# Altium PCB CO2_Sensor_Unit_board.PcbDoc
Units mm, origin at the board's own origin, x right, y up, seen from the top; angles counter-clockwise.
Board outline 70 x 70 mm, 4 copper layers (Component Side Top, Ground Plane, Power Plane, Component Side Bottom), stack 0.844 mm thick; 81 components, 62 nets, 346 pads, 128 vias.
Unrouted connection lines stored in the file: 6.
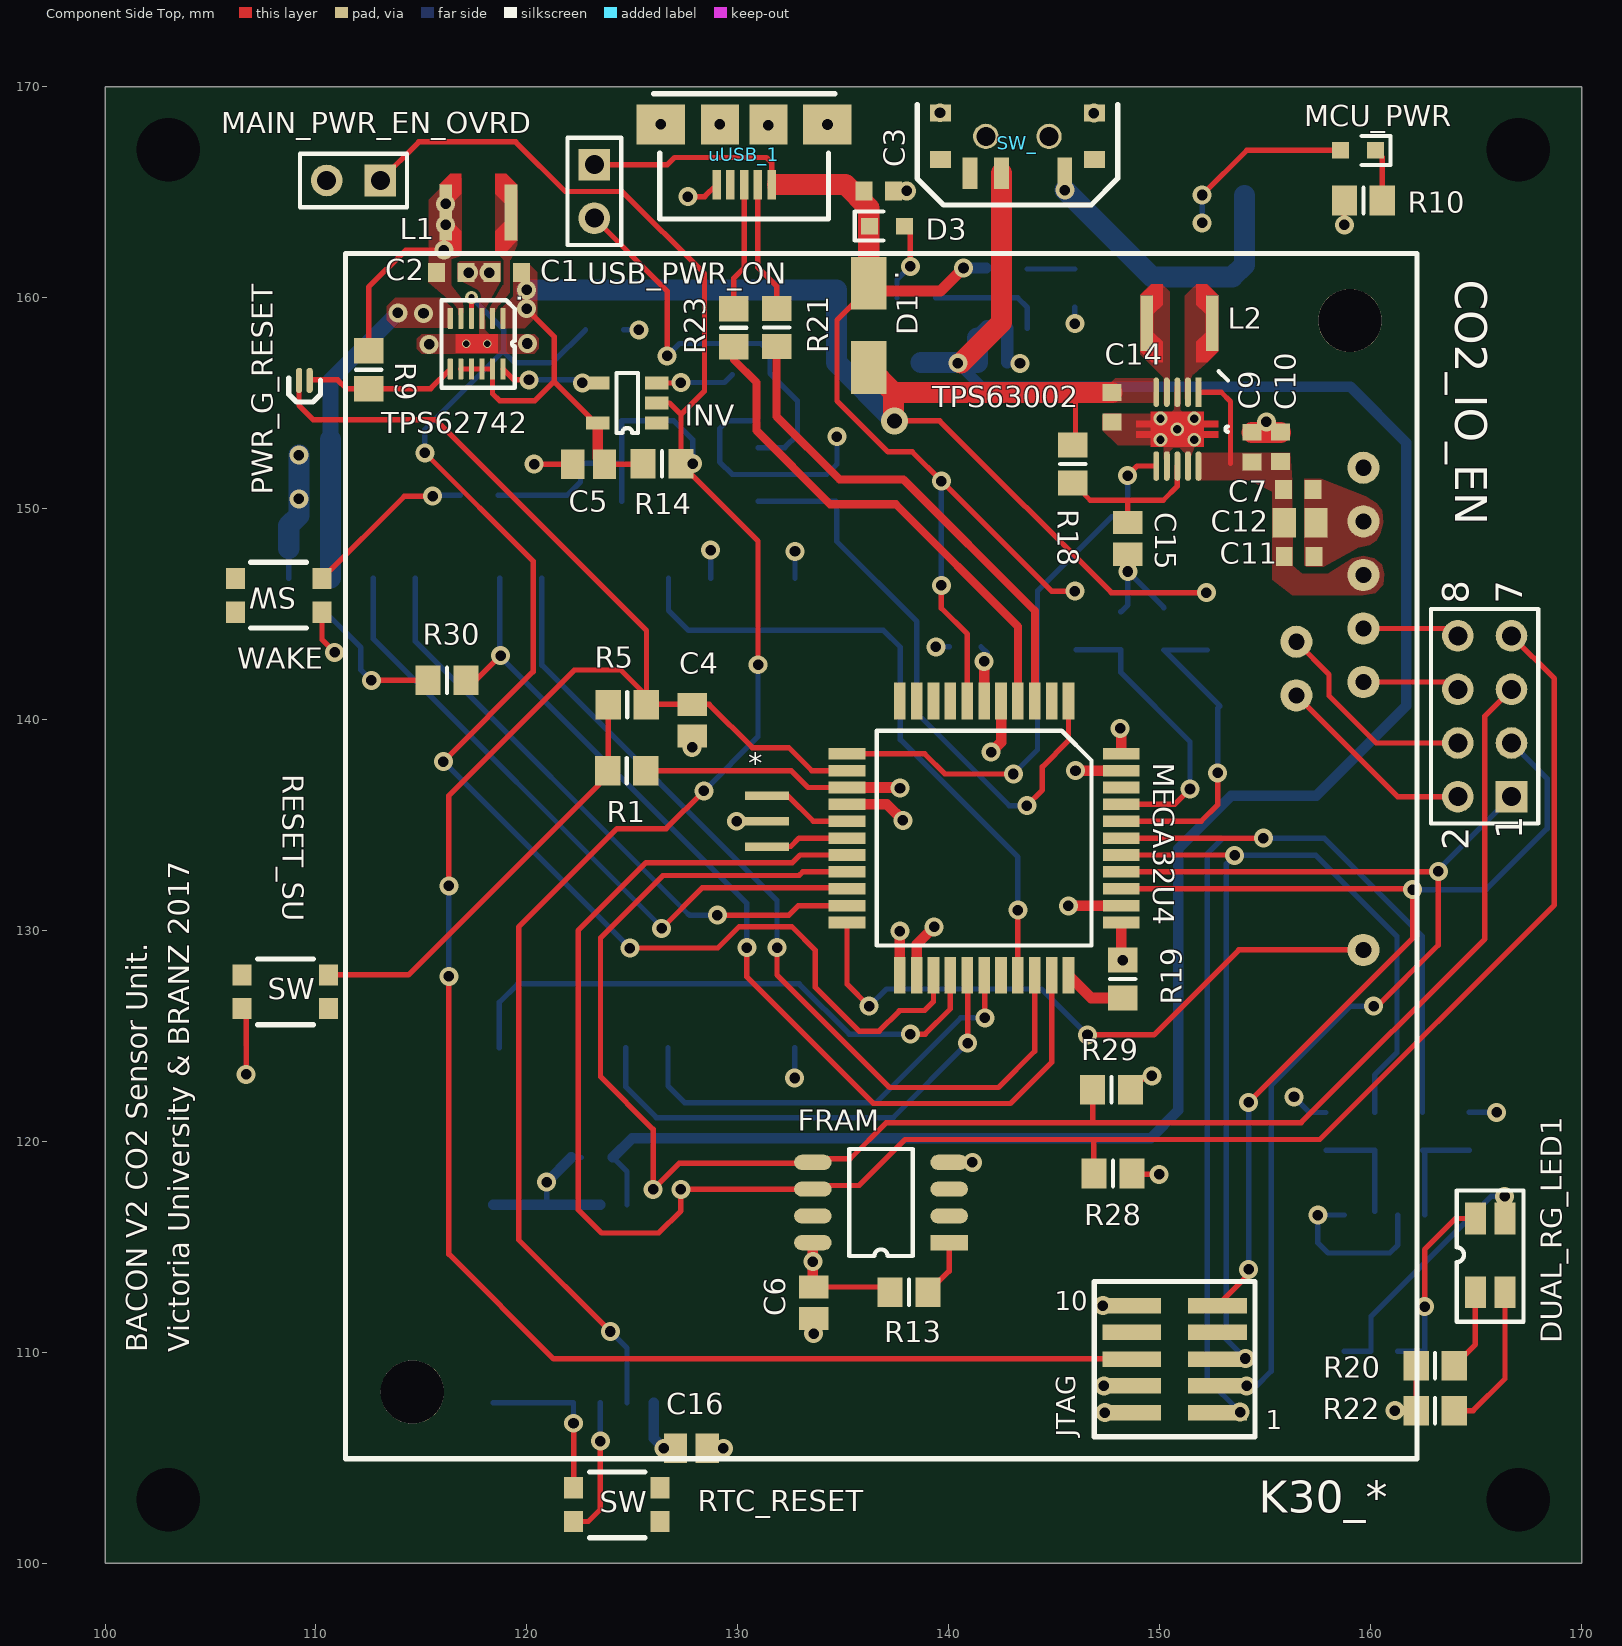
[diagram p0: Component Side Top view]
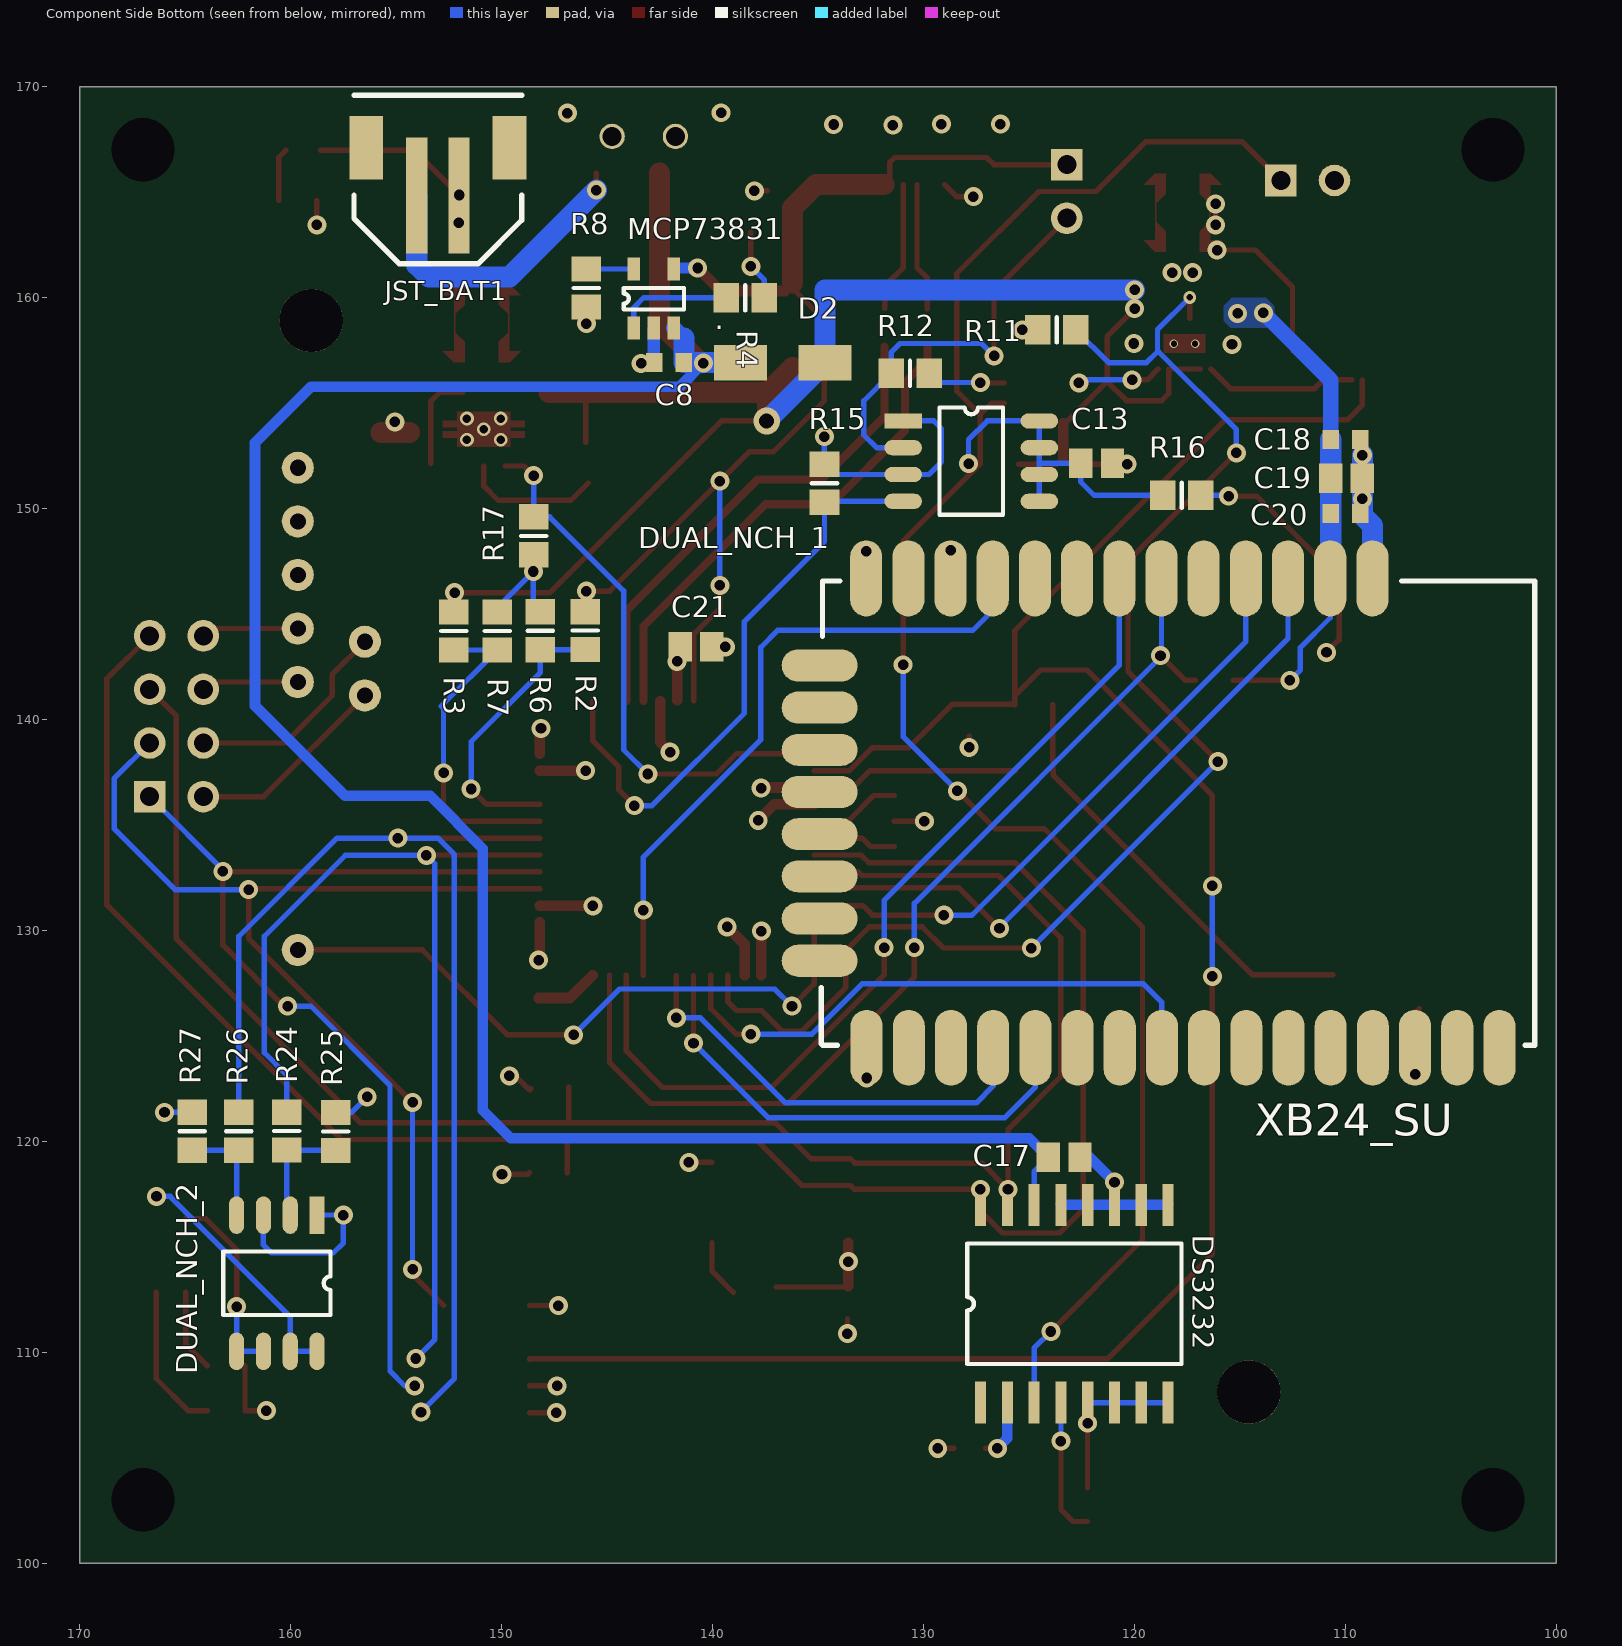
[diagram p1: Component Side Bottom view, seen from below]
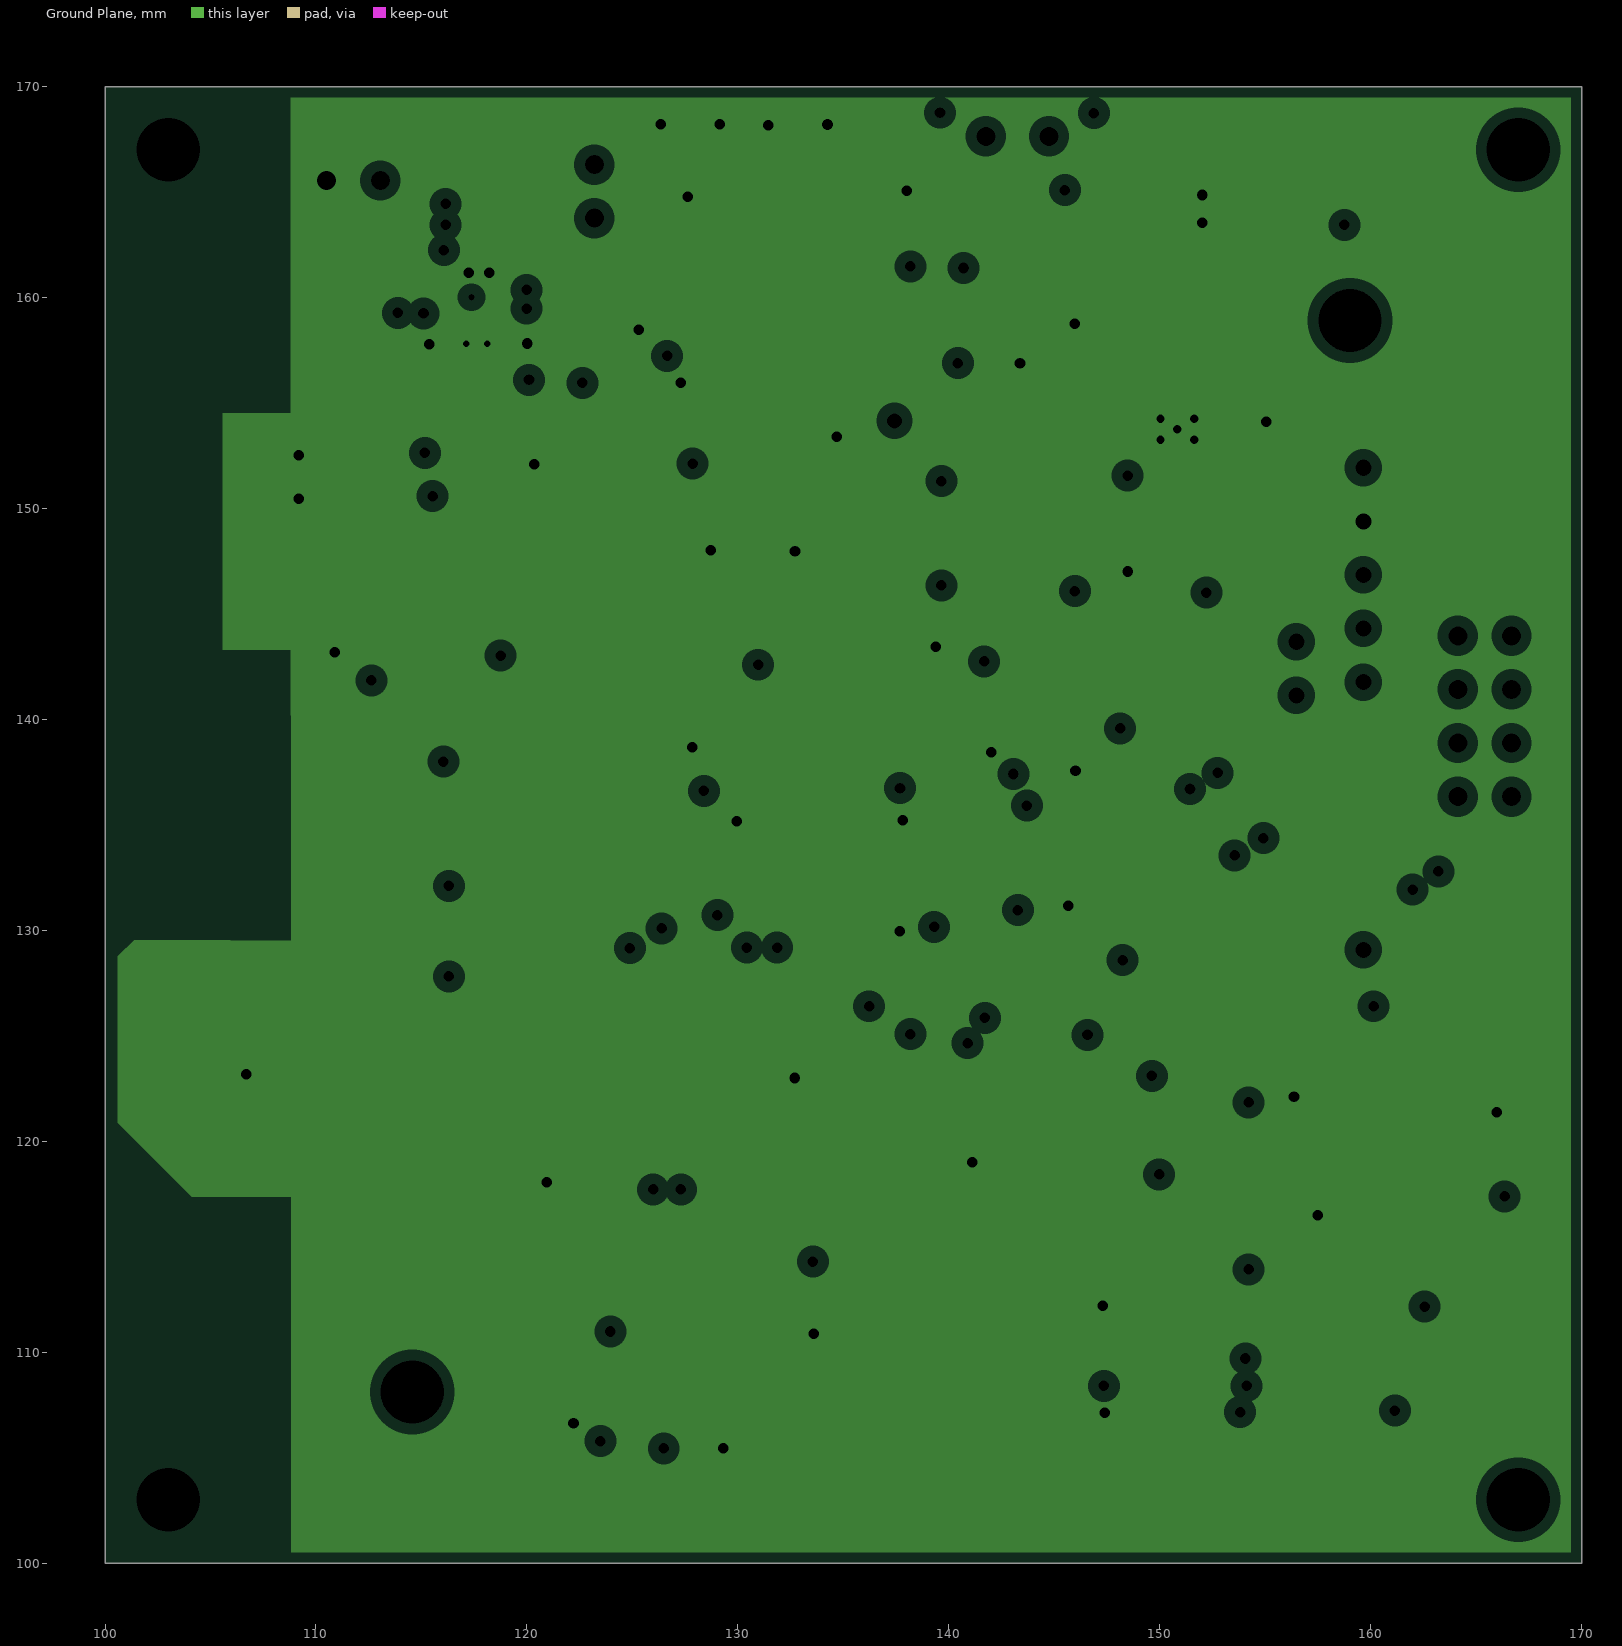
[diagram p2: Ground Plane, clearances drawn from the general rule]
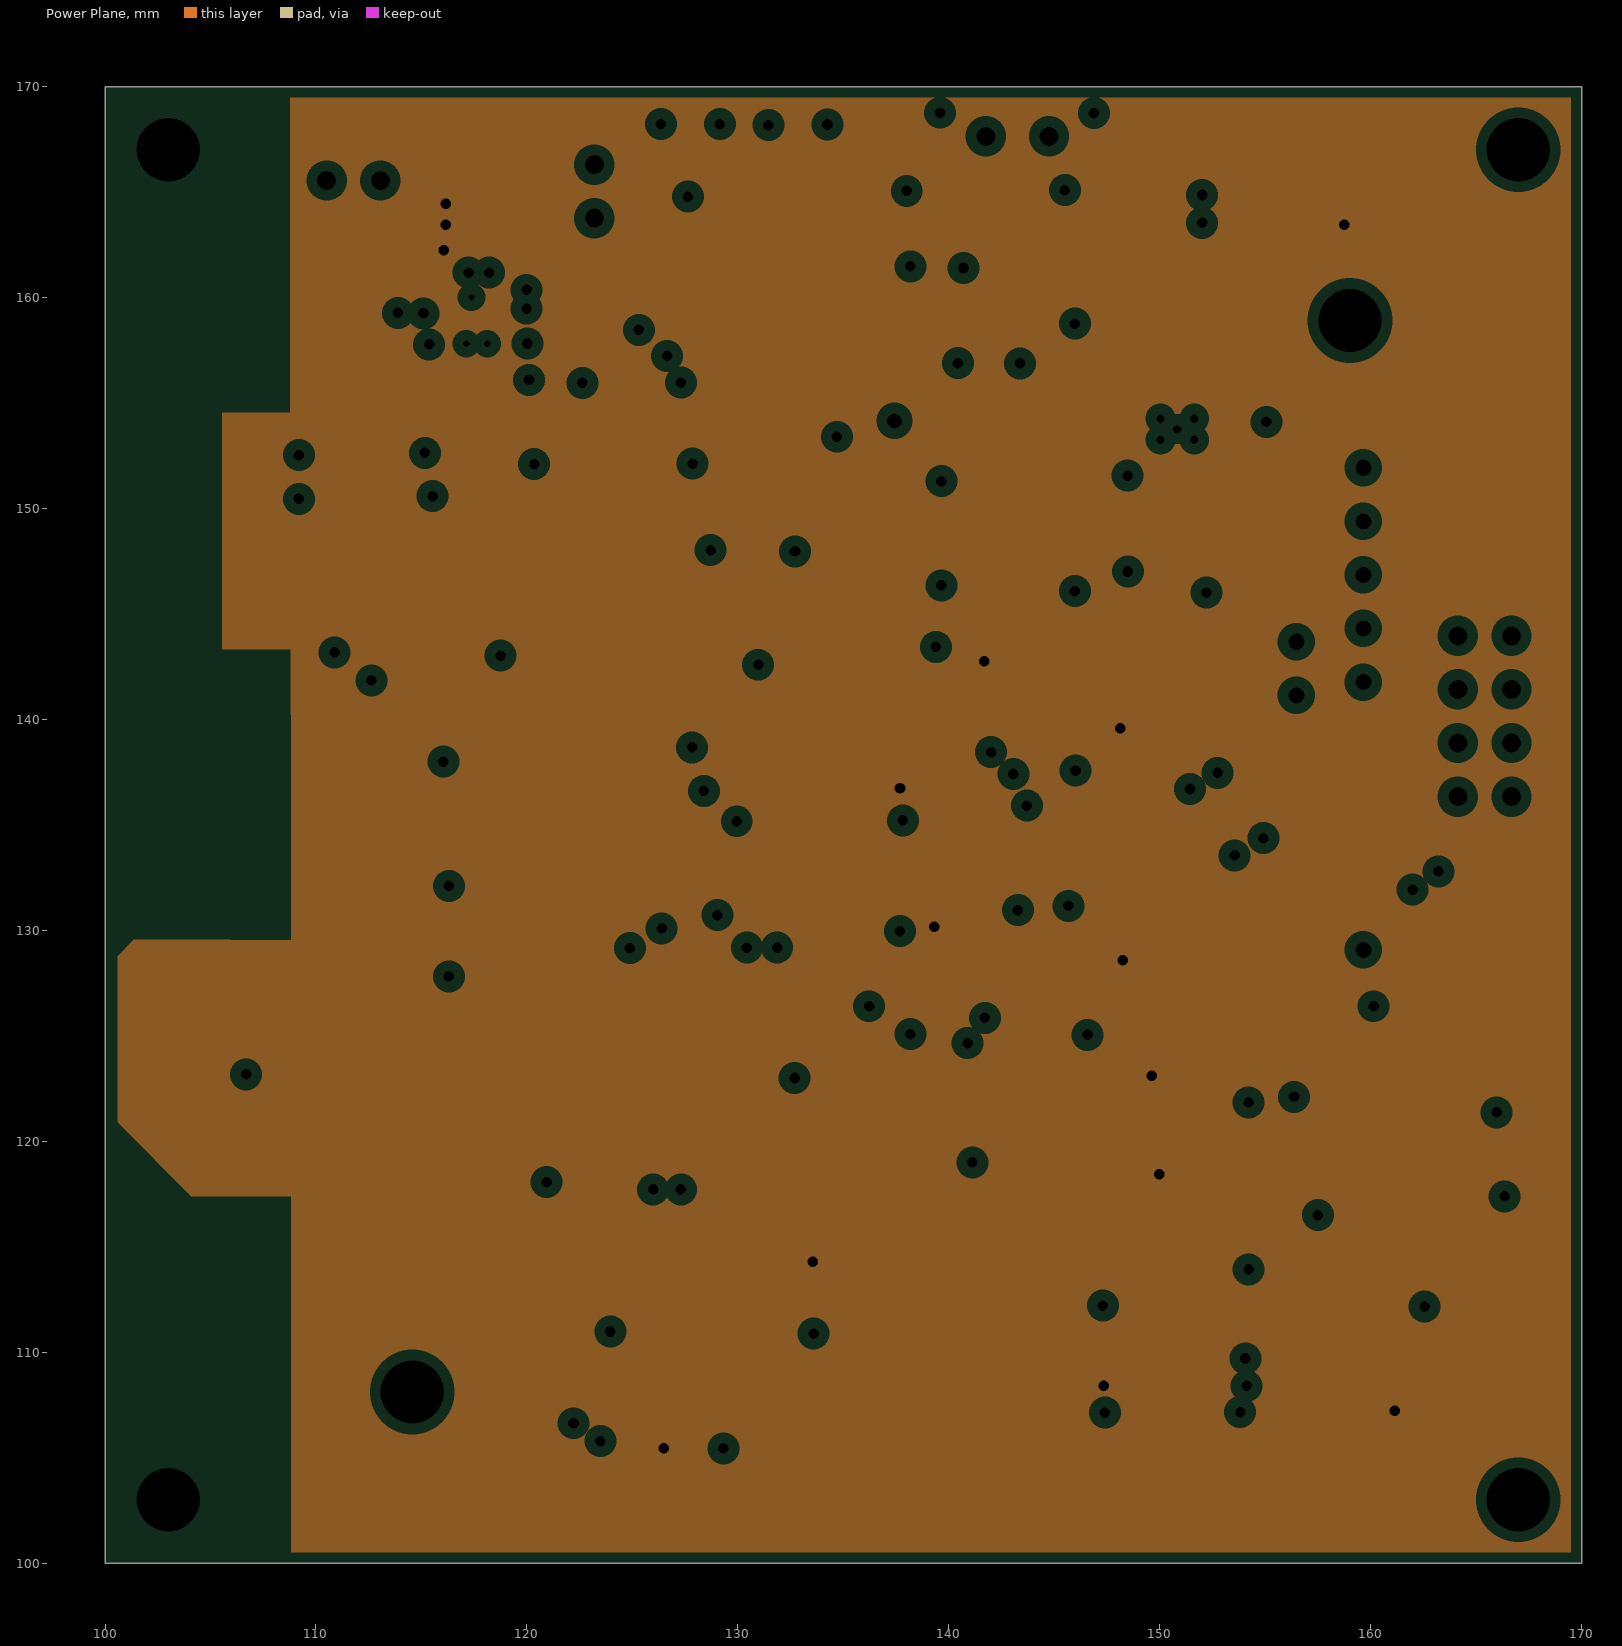
[diagram p3: Power Plane, clearances drawn from the general rule]

## Layer stack, top to bottom
Top Solder: solder mask 0.0102, Solder Resist, Dk 3.5
Component Side Top: signal copper 0.0356
Dielectric 1: core 0.32, FR-4, Dk 4.8
Ground Plane: plane copper 0.036, net GND
Dielectric 3: prepreg 0.127, Dk 4.2
Power Plane: plane copper 0.036, net +3V3
Dielectric 4: core 0.254, Dk 4.2
Component Side Bottom: signal copper 0.0356
Bottom Solder: solder mask 0.0102, Solder Resist, Dk 3.5

## Board outline
100,100 170,100 170,170 100,170

## Design rules (kind name [scope] priority, off if disabled: settings)
Clearance [All] p1: gap=0.152
DiffPairsRouting [All] p1: maxlimit=0.254 minlimit=0.254 mostfreqgap=0.254 toplayer_minwidth=0.381 toplayer_maxwidth=0.381 toplayer_prefwidth=0.381 bottomlayer_minwidth=0.381 bottomlayer_maxwidth=0.381 bottomlayer_prefwidth=0.381 maxuncoupledlength=12.7
HoleSize [All] p1: absolutevalues=TRUE maxlimit=6.3 minlimit=0.3 maxpercent=80.000 minpercent=20.000
MinimumAnnularRing [All] p1: minimumring=0.152
PlaneClearance [All] p1: clearance=0.508
PlaneConnect [All] p1: planeconnectstyle=Direct reliefexpansion=0.508 reliefentries=4 reliefconductorwidth=0.254 reliefairgap=0.254
PolygonConnect [All] p1: connectstyle=Direct reliefconductorwidth=0.254 reliefentries=4 polygonreliefangle="90 Angle" airgapwidth=0.254
RoutingVias [All] p1: holewidth=0.5 width=0.9 viastyle="Through Hole" minholewidth=0.4 minwidth=0.8 maxholewidth=1 maxwidth=1.5
SolderMaskExpansion [All] p1: expansion=0.102
Width [All] p1: maxlimit=10 minlimit=0.152 preferedwidth=0.254
26 further rules are at their usual default settings.

## Classes and differential pairs
differential pair D_SU2: +D_SU2_P -D_SU2_N

## Components (designator, comment, footprint, x,y, rotation, side; value= is the part's Value field where it differs from the comment)
* "Resonator_8MHz" Resonator_8MHz 131.38,133.97 r90 top
C1 "Cap Semi" 1608[0603] 119.04,161.18 r0 top
C2 "Cap Semi" 1608[0603] 116.42,161.18 r180 top
C3 "Cap Semi" 1608[0603] 136.69,165.06 r180 top
C4 "Cap Semi" C0805 127.83,139.96 r90 top
C5 "Cap Semi" C0805 122.93,152.09 r0 top
C6 "Cap Semi" C0805 133.6,112.34 r90 top
C7 "Cap Semi" 1608[0603] 156.57,150.91 r0 top
C8 "Cap Semi" 1608[0603] 142.06,156.92 r180 bottom
C9 "Cap Semi" 1608[0603] 154.37,152.91 r90 top
C10 "Cap Semi" 1608[0603] 155.74,152.93 r90 top
C11 "Cap Semi" 1608[0603] 156.61,147.73 r0 top
C12 "Cap Semi" C0805 156.66,149.33 r0 top
C13 "Cap Semi" C0805 121.79,152.15 r180 bottom
C14 "Cap Semi" 1608[0603] 147.75,154.8 r90 top
C15 "Cap Semi" C0805 148.49,148.58 r270 top
C16 "Cap Semi" C0805 127.8,105.44 r180 top
C17 "Cap Semi" C0805 123.33,119.23 r0 bottom
C18 "Cap Semi" 1608[0603] 109.99,153.27 r180 bottom
C19 "Cap Semi" C0805 109.94,151.43 r180 bottom
C20 "Cap Semi" 1608[0603] 109.99,149.76 r180 bottom
C21 "Cap Semi" C0805 140.78,143.44 r0 bottom
CO2_IO_EN "Header 4X2" HDR2X4 166.68,136.34 r90 top
D1 "Diode" DO-214AC 136.21,160.68 r270 top
D2 "Diode" DO-214AC 138.67,156.91 r180 bottom
D3 "LED2" LED_Single_Orange 136.25,163.38 r0 top
DS3232 "DS3231" "16 SO" 127.29,107.61 r90 bottom
DUAL_NCH_1 "DUAL_MOSFET_IRF8915TRPBF" SOP-8 130.96,154.15 r180 bottom
DUAL_NCH_2 "DUAL_MOSFET_IRF8915TRPBF" SOP-8 158.75,116.5 r270 bottom
DUAL_RG_LED1 "LED_GREEN_RED_HSMF" LED4 164.97,112.84 r90 top
FRAM "FRAM 8-SOP" SOP-8 140.02,115.19 r180 top
INV "Inverter" SOT-23 126.16,154.05 r180 top (schematic designator INV_)
JST_BAT1 "JST_CON" JST_CONN_SMT_Vertical 152.019,164.846 r180 bottom
JTAG "FTSH-105-01-XXX-DV-K" FTSH-105-01-XXX-DV-K 150.71,109.67 r90 top
K30_* "K30_STA" K30_STA 159.66,141.77 r180 top locked
L1 "Inductor" 2.2uH_Inductor 119.25,164.03 r180 top
L2 "Inductor" 2.2uH_Inductor 149.39,158.78 r0 top
MAIN_PWR_EN_OVRD "Header 2" HDR1X2 113.05,165.55 r180 top
MCP73831 "MCP73831" SOT-23 143.73,158.55 r90 bottom
MCU_PWR "LED2" LED_Single_Orange 160.23,166.98 r180 top
MEGA32U4 "ATMEGA32U4-AUR" Quad44 145.68,140.87 r270 top locked (schematic designator MEGA32U4_)
PWR_G_RESET "Header 2" SMD_Jumper 109.7,156.07 r90 top (schematic designator PWR_GOOD_MCU_RESET)
R1 "Res3" 6-0805_N 124.74,137.57 r0 top
R2 "Res3" 6-0805_N 146.04,144.21 r90 bottom
R3 "Res3" 6-0805_N 152.26,144.19 r90 bottom
R4 "Res3" 6-0805_N 138.45,159.98 r0 bottom
R5 "Res3" 6-0805_N 124.76,140.7 r180 top
R6 "Res3" 6-0805_N 148.16,144.2 r270 bottom
R7 "Res3" 6-0805_N 150.2,144.19 r270 bottom
R8 "Res3" 6-0805_N 145.98,160.45 r90 bottom
R9 "Res3" 6-0805_N 112.5,156.58 r90 top
R10 "Res3" 6-0805_N 159.66,164.6 r0 top
R11 "Res3" 6-0805_N 123.68,158.47 r180 bottom
R12 "Res3" 6-0805_N 130.63,156.4 r0 bottom
R13 "Res3" 6-0805_N 138.12,112.84 r180 top
R14 "Res3" 6-0805_N 126.41,152.11 r0 top
R15 "Res3" 6-0805_N 134.69,151.19 r270 bottom
R16 "Res3" 6-0805_N 117.75,150.62 r0 bottom
R17 "Res3" 6-0805_N 148.48,148.7 r270 bottom
R18 "Res3" 6-0805_N 145.89,152.11 r270 top
R19 "Res3" 6-0805_N 148.24,127.69 r270 top
R20 "Res3" 6-0805_N 163.06,109.36 r180 top
R21 "Res3" 6-0805_N 131.84,158.58 r270 top
R22 "Res3" 6-0805_N 163.06,107.23 r180 top
R23 "Res3" 6-0805_N 129.81,158.57 r270 top
R24 "Res3" 6-0805_N 160.19,120.48 r90 bottom
R25 "Res3" 6-0805_N 157.87,120.46 r270 bottom
R26 "Res3" 6-0805_N 162.46,120.47 r90 bottom
R27 "Res3" 6-0805_N 164.67,120.47 r270 bottom
R28 "Res3" 6-0805_N 147.79,118.47 r180 top
R29 "Res3" 6-0805_N 147.72,122.45 r180 top
R30 "Res3" 6-0805_N 116.21,141.85 r0 top
RESET_SU "SW-PB" SW_TACTILE 106.49,127.89 r0 top
RTC_RESET "SW-PB" SW_TACTILE 122.22,103.57 r0 top (schematic designator RTC_RESET_1)
SW_ "Slide_switch" Slide_SW 143.256,167.64 r180 top
TPS62742 "TPS62742" "WSON12 - small" 118.872,159.512 r270 top
TPS63002 "TPS63002DRCT" "SON10 - small" 151.84,155.56 r270 top (schematic designator TPS63002_)
USB_PWR_ON "Header 2" HDR1X2 123.2,166.3 r270 top
uUSB_1 "micro_USB" MicroUSB_CONN 130.302,165.354 r180 top
WAKE "SW-PB" SW_TACTILE 110.29,145.08 r180 top
XB24_SU "XB24CDMUIS-001" XB24_RADIO 108.712,146.558 r270 bottom locked

## Footprints (in the part's own frame and the unit in brackets; to place one, negate y for a bottom-side part, rotate by r counter-clockwise, add the part's x,y. Pads: shape width x height; smd on the part's side, far side on the other; paste and mask are expansions set on the pad)
2.2uH_Inductor [mm] "LPS3314-222MRB"
  rect 0.6x2.65 smd: 1(0,0) 2(3.1,0)
  Component Side Top region: -0.3,1.325 0.225,1.85 0.75,1.85 0.75,0.882 0.3,0.44 0.3,-0.44 0.75,-0.882 0.75,-1.85 0.225,-1.85 -0.3,-1.325 0.25,-1.325 0.25,1.325
  Component Side Top region: 3.4,-1.325 2.875,-1.85 2.35,-1.85 2.35,-0.882 2.8,-0.44 2.8,0.44 2.35,0.882 2.35,1.85 2.875,1.85 3.4,1.325 2.85,1.325 2.85,-1.325
  body extent -0.3,-1.85 3.4,1.85, height 1.4
6-0805_N [mm] "Chip Resistor, Body 2.0x1.2mm, IPC Medium Density"
  rect 1.2x1.4 smd: 1(-0.9,0) 2(0.9,0)
  silkscreen extent 0,-0.6 0,0.6, body extent -1.07,-0.7 1.07,0.7, height 0.7
"16 SO" [mm]
  rect 1.98x0.53 smd: 1(0,0) 2(0,-1.27) 3(0,-2.54) 4(0,-3.81) 5(0,-5.08) 6(0,-6.35) 7(0,-7.62) 8(0,-8.89) 9(9.37,-8.89) 10(9.37,-7.62) 11(9.37,-6.35) 12(9.37,-5.08) 13(9.37,-3.81) 14(9.37,-2.54) 15(9.37,-1.27) 16(9.37,0)
  silkscreen extent 1.83,-9.53 7.54,0.63, body extent 1.83,-9.53 7.54,0.63, height 3
1608[0603] [mm] "Chip Capacitor, Body 1.6x0.8mm, IPC High Density"
  rect 0.8x0.9 smd: 1(-0.7,0) 2(0.7,0)
  body extent -0.87,-0.48 0.87,0.48, height 1.3
C0805 [mm] "Chip Capacitor, Body 2.0x1.3mm, IPC High Density"
  rect 1.1x1.4 smd: 1(-0.75,0) 2(0.75,0)
  body extent -1.1,-0.72 1.1,0.72, height 1.4
DO-214AC [mm] "DIODE B340A-13-F"
  rect 2.5x1.7 smd: 1(0,0) 2(4,0)
  body extent -0.68,-1.4 4.68,1.4, height 2.3
FTSH-105-01-XXX-DV-K [mil]
  rect 29x110 smd mask+2: 1(-100,-80) 2(-100,80) 3(-50,-80) 4(-50,80) 5(0,-80) 6(0,80) 7(50,-80) 8(50,80) 9(100,-80) 10(100,80)
  silkscreen extent -145,-150 145,150
HDR1X2 [mm] "Connector; Header; 2 Position"
  rect 1.5x1.5 hole 0.9: 1(0,0)
  round 1.5 hole 0.9: 2(2.54,0)
  silkscreen extent -1.27,-1.27 3.81,1.27
HDR2X4 [mm] "Connector; Header; 4x2 Position"
  rect 1.5x1.5 hole 0.9: 1(0,0)
  round 1.5 hole 0.9: 2(0,2.54) 3(2.54,0) 4(2.54,2.54) 5(5.08,0) 6(5.08,2.54) 7(7.62,0) 8(7.62,2.54)
  silkscreen extent -1.27,-1.27 8.89,3.81
JST_CONN_SMT_Vertical [mm] "B2B-PH-SM4-TB(LF)(SN) 2 Contacts Surface mount JST connector"
  rect 1x5.5 smd: 1(0,0) 2(-2,0)
  rect 1.6x3 smd: 3(-4.4,2.25) 3(2.4,2.25)
  silkscreen extent -4.97,-3.25 2.98,4.75, body extent -4.97,-0.25 2.98,4.75, height 6.6
K30_STA [mil]
  round 60 hole 30: 1(0,500) 2(0,0) 3(0,-100) 4(125.2,24.8) 5(125.2,-75.2) 6(0,-200) 7(0,-300) 8(0,-400)
  round 118.11 hole 118.11 unplated: 9(25.2,-674.8) 9(1775.2,1325.2)
  silkscreen extent -100,-800 1900,1450, body extent -100,-800 1900,1450, height 807
LED4 [mm]
  rect 1.5x1 smd: 1(0,0) 2(3.5,0) 3(0,-1.4) 4(3.5,-1.4)
  silkscreen extent -1.4,-2.29 4.83,0.89, body extent -0.03,-1.88 3.62,0.5, height 2
LED_Single_Orange [mm] "KP-1608SECK"
  rect 0.8x0.8 smd: 1(0,0) 2(1.65,0)
  silkscreen extent -0.71,-0.67 0.65,0.7, body extent -0.07,-0.5 1.77,0.46, height 2
MicroUSB_CONN [mm]
  rect 0.4x1.4 smd: 1(-1.3,0) 2(-0.65,0) 3(0,0) 4(0.65,0) 5(1.3,0)
  rect 2.3x1.9 smd: 5(-3.95,-2.85) 5(3.95,-2.85)
  rect 1.8x1.9 smd: 5(-1.15,-2.85) 5(1.15,-2.85)
  silkscreen extent -4.3,-4.3 4.3,1.63
Quad44 [mm]
  rect 1.75x0.55 smd: 1(0,0) 2(0,-0.8) 3(0,-1.6) 4(0,-2.4) 5(0,-3.2) 6(0,-4) 7(0,-4.8) 8(0,-5.6) 9(0,-6.4) 10(0,-7.2) 11(0,-8) 23(13,-8) 24(13,-7.2) 25(13,-6.4) 26(13,-5.6) 27(13,-4.8) 28(13,-4) 29(13,-3.2) 30(13,-2.4) 31(13,-1.6) 32(13,-0.8) 33(13,0)
  rect 0.55x1.75 smd: 12(2.5,-10.5) 13(3.3,-10.5) 14(4.1,-10.5) 15(4.9,-10.5) 16(5.7,-10.5) 17(6.5,-10.5) 18(7.3,-10.5) 19(8.1,-10.5) 20(8.9,-10.5) 21(9.7,-10.5) 22(10.5,-10.5) 34(10.5,2.5) 35(9.7,2.5) 36(8.9,2.5) 37(8.1,2.5) 38(7.3,2.5) 39(6.5,2.5) 40(5.7,2.5) 41(4.9,2.5) 42(4.1,2.5) 43(3.3,2.5) 44(2.5,2.5)
  silkscreen extent 1.41,-9.09 11.59,1.09, body extent 1.27,-9.27 11.68,1.27, height 1.2
Resonator_8MHz [mm] "CSTCE8M00G55Z-R0"
  rect 0.4x2.1 smd: 1(0,0) 2(1.2,0) 3(2.4,0)
  body extent -0.33,-0.95 2.84,0.94, height 1.2
Slide_SW [mm] "PCM12SMTR"
  rect 0.7x1.5 smd: 1(-2.25,1.75) 2(0.75,1.75) 3(2.25,1.75)
  rect 1x0.8 smd: 4(-3.65,-1.1) 4(-3.65,1.1) 4(3.65,-1.1) 4(3.65,1.1)
  round 1.2 hole 0.9: 5(-1.5,0) 5(1.5,0)
  silkscreen extent -4.75,-1.5 4.75,3.25, body extent -3.14,-1.65 3.11,1.58, height 3
SMD_Jumper [mm] "Connector; Header; 2 Position"
  oval 1.2x0.3 smd: 1(0,0) 2(0,0.5)
  silkscreen extent -1.02,-0.52 0.1,0.99
"SON10 - small" [mm]
  rect 1.4x0.28 smd: 1(0.05,0)
  oval 1.4x0.28 smd: 2(0.05,-0.5) 3(0.05,-1) 4(0.05,-1.5) 5(0.05,-2) 6(3.55,-2) 7(3.55,-1.5) 8(3.55,-1) 9(3.55,-0.5) 10(3.55,0)
  Component Side Top region: 1.4,0.25 1.4,0.95 1.7,0.95 1.7,0.25 1.9,0.25 1.9,0.95 2.2,0.95 2.2,0.25 2.625,0.25 2.625,-2.25 2.2,-2.25 2.2,-2.95 1.9,-2.95 1.9,-2.25 1.7,-2.25 1.7,-2.95 1.4,-2.95 1.4,-2.25 0.975,-2.25 0.975,0.25
  silkscreen extent -0.94,0.96 1.92,1.4, body extent 0.01,-2.95 3.65,0.96, height 2
SOP-8 [mm]
  rect 1.78x0.72 smd: 1(0,0)
  oval 1.78x0.72 smd: 2(0,-1.27) 3(0,-2.54) 4(0,-3.81) 5(6.46,-3.81) 6(6.46,-2.54) 7(6.46,-1.27) 8(6.46,0)
  silkscreen extent 1.72,-4.45 4.74,0.63, body extent 1.72,-4.45 4.74,0.63, height 2
SOT-23 [mm]
  rect 1.1x0.6 smd: 1(0,0) 2(0,-0.95) 3(0,-1.9) 4(2.8,-1.9) 5(2.8,0)
  silkscreen extent 0.89,-2.38 1.91,0.48, body extent 0.72,-2.19 2.08,0.24, height 2
SW_TACTILE [mm] "KMR231G LFS"
  rect 0.9x1 smd: 1(0,0) 1(4.1,0) 2(0,-1.6) 2(4.1,-1.6)
  silkscreen extent 0.75,-2.37 3.37,0.75, body extent 0.27,-2.13 3.77,0.55, height 2
"WSON12 - small" [mm]
  rrect40% 1x0.25 smd mask+0.07: 1(0.5,0) 2(0.5,-0.5) 3(0.5,-1) 4(0.5,-1.5) 5(0.5,-2) 6(0.5,-2.5) 7(2.9,-2.5) 8(2.9,-2) 9(2.9,-1.5) 10(2.9,-1) 11(2.9,-0.5) 12(2.9,0)
  Component Side Top region: 1.25,-2.25 2.15,-2.25 2.15,-0.25 1.25,-0.25
  silkscreen extent -0.36,-2.93 3.79,0.55, body extent 0.47,-2.74 3.02,0.24, height 2
XB24_RADIO [mm] "XB24CDMUIS-001"
  oval 3.6x1.52 smd: 1(-0.125,0) 2(-0.125,-2) 3(-0.125,-4) 4(-0.125,-6) 5(-0.125,-8) 6(-0.125,-10) 7(-0.125,-12) 8(-0.125,-14) 9(-0.125,-16) 10(-0.125,-18) 11(-0.125,-20) 12(-0.125,-22) 13(-0.125,-24) 22(22.125,-23.98) 23(22.125,-21.98) 24(22.125,-19.98) 25(22.125,-17.98) 26(22.125,-15.98) 27(22.125,-13.98) 28(22.125,-11.98) 29(22.125,-9.98) 30(22.125,-7.98) 31(22.125,-5.98) 32(22.125,-3.98) 33(22.125,-1.98) 34(22.125,0.02) 35(22.125,2.02) 36(22.125,4.02) 37(22.125,6.02)
  oval 1.52x3.6 smd: 14(4,-26.21) 15(6,-26.21) 16(8,-26.21) 17(10,-26.21) 18(12,-26.21) 19(14,-26.21) 20(16,-26.21) 21(18,-26.21)
  silkscreen extent 0,-26.12 22,7.7, body extent 0,-26.07 22,7.7, height 4

## Part data
C1 C2 C3 C4 C5 C6 C7 C8 C9 C10 C11 C12 C13 C14 C15 C16 C17 C18 C19 C20 C21: "Capacitor (Semiconductor SIM Model)"
CO2_IO_EN: "Header, 4-Pin, Dual row"
D1 D2: "Default Diode"
D3 MCU_PWR: "Typical RED, GREEN, YELLOW, AMBER GaAs LED"
INV: library part SN74LVC1GU04
JTAG: "TERMINAL STRIP, .050\"(1.27mm) PITCH, 10 PINS, KEYED"
MAIN_PWR_EN_OVRD PWR_G_RESET USB_PWR_ON: "Header, 2-Pin"
R1 R2 R3 R4 R5 R6 R7 R8 R9 R10 R11 R12 R13 R14 R15 R16 R17 R18 R19 R20 R21 R22 R23 R24 R25 R26 R27 R28 R29 R30: "Resistor"
RESET_SU RTC_RESET WAKE: "Switch"
TPS63002: library part TPS63001DRCT

## Free pads (board coordinates)
  round 0 hole 3: 0(103,103) 0(103,167) 0(167,103) 0(167,167)

## Via types
v1: diameter 0.9, hole 0.5, Component Side Top to Component Side Bottom, 103 vias
v2: diameter 0.9, hole 0.5, Component Side Top to Component Side Bottom, tented both sides, 8 vias
v3: diameter 0.9, hole 0.5, Component Side Top to Component Side Bottom, tented bottom, 6 vias
v4: diameter 0.65, hole 0.4, Component Side Top to Component Side Bottom, tented top, 5 vias
v5: diameter 0.4, hole 0.3, Component Side Top to Component Side Bottom, tented both sides, 2 vias
v6: diameter 0.9, hole 0.5, Component Side Top to Component Side Bottom, tented top, 2 vias
v7: diameter 1.27, hole 0.711, Component Side Top to Component Side Bottom, 1 vias
v8: diameter 0.61, hole 0.3, Component Side Top to Component Side Bottom, 1 vias

## Nets (pads, with @x,y where several pads share a name; then routed paths per layer and width w, separated by ;. In a path a pad name is that pad's centre, name@x,y a point inside that pad or via, vN(x,y) a via of type N, cw(c..) or ccw(c..) an arc to the next point about the centre after c; other vN are vias at no path point)
+3V3: C2.2 C6.2 C16.2 C21.2 DS3232.2 FRAM.8 JTAG.4 L1.2 MEGA32U4.6 MEGA32U4.14 MEGA32U4.24 MEGA32U4.34 MEGA32U4.44 R1.2 R9.2 R10.1 R13.2 R19.1 R20.2 R22.2 R28.1 R29.1 TPS62742.5 | length 45.8
  Component Side Top w0.254: R9.2 112.5,160.49 114.26,162.25 v1(116.07,162.25) v1@116.14,162.18 ; v1(116.15,163.44) L1.2 v1(116.15,164.44) ; R1.2 132.53,137.57 133.33,136.77 MEGA32U4.14 ; v1(126.49,105.44) C16.2 ; C6.2 R13.2@136.97,113.09 ; v2@137.66,136.77 v2(137.69,136.74) ; v1(147.36,108.4) JTAG.4 ; R29.1@148.62,122.48 148.67,122.43 149.34,123.1 v1(149.63,123.1) ; R28.1@148.69,118.5 148.76,118.43 v1(149.98,118.43) ; v1(158.76,163.44) R10.1 ; v1(161.15,107.23) R22.2 R20.2
  Component Side Top w0.5: C6.2@133.56,113.13 v1(133.56,114.29) FRAM.8 ; MEGA32U4.14 v2@137.66,136.77 ; MEGA32U4.24 138.48,129.33 v2(139.31,130.16) ; MEGA32U4.6@141.68,140.9 v1(141.68,142.75) ; v1(148.13,139.57) 148.18,139.52 MEGA32U4.44 ; MEGA32U4.34 148.18,128.65 v1(148.24,128.59)
  Component Side Bottom w0.254: C21.2 141.83,143.14 141.83,142.87 v1(141.68,142.75)
  Component Side Bottom w0.5: DS3232.2 126.02,105.91 v1(126.49,105.44)
+3V3_RADIO_SU: C18.1 C19.1 C20.1 R30.1 TPS62742.6 XB24_SU.2 | length 20.5
  Component Side Top w0.254: v3(112.63,141.85) R30.1 ; v1@114.88,159.25 v1(115.1,159.25)
  Component Side Bottom w0.254: 110.712,144.818 112.13,143.4 112.13,142.35 v3(112.63,141.85)
  Component Side Bottom w0.75: C18.1 110.69,156.08 v1(113.88,159.27)
  Component Side Bottom w1: XB24_SU.2@110.69,146.705 C20.1 C19.1 C18.1
CO2_EN: MEGA32U4.12 R17.1 TPS63002.6 | length 26.7
  Component Side Top w0.254: MEGA32U4.12 138.86,138.37 139.82,137.41 v6(143.06,137.41) ; v1(148.48,151.56) 148.93,152.01 TPS63002.6
  Component Side Bottom w0.254: v6(143.06,137.41) 144.21,138.56 144.21,146.09 147.72,149.6 R17.1 v1(148.48,151.56)
CO2_PWR: C7.1 C9.1 C10.1 C11.1 C12.1 K30_*.6 TPS63002.1 TPS63002.10 | length 4.6
  Component Side Top w0.254: TPS63002.1 152.92,155.51 153.36,155.07 153.36,152.13
CO2_STAT: K30_*.1 MEGA32U4.22 | length 30.7
  Component Side Top w0.254: MEGA32U4.22 135.18,127.45 v1(136.23,126.4) ; v1(146.58,125.04) 149.728,125.04 153.758,129.07 K30_*.1
  Component Side Bottom w0.254: v1(136.23,126.4) 137.05,127.22 144.4,127.22 v1(146.58,125.04)
CTS_SU: MEGA32U4.28 XB24_SU.25 | length 20.8
  Component Side Top w0.254: v1(141.71,125.85) MEGA32U4.28@141.71,127.84
  Component Side Bottom w0.254: XB24_SU.25 126.692,122.618 127.49,121.82 136.54,121.82 140.57,125.85 v1(141.71,125.85)
D_SU2_N: MEGA32U4.3 R21.2 | length 23.7
  Component Side Top w0.381: R21.2 131.84,154.36 134.83,151.37 137.86,151.37 144.08,145.15 MEGA32U4.3
D_SU2_P: MEGA32U4.4 R23.2 | length 24.2
  Component Side Top w0.381: R23.2 129.81,157.05 130.88,155.98 130.88,153.69 134.37,150.2 137.49,150.2 143.28,144.41 MEGA32U4.4
D_SU_N: R21.1 uUSB_1.2 | length 6.2
  Component Side Top w0.254: uUSB_1.2 130.952,161.428 131.84,160.54 R21.1
D_SU_P: R23.1 uUSB_1.3 | length 6.1
  Component Side Top w0.254: R23.1 129.81,160.92 130.302,161.412 uUSB_1.3
DTR_SU: MEGA32U4.30 XB24_SU.10 | length 31.1
  Component Side Top w0.254: MEGA32U4.30 v2(143.28,130.96)
  Component Side Bottom w0.254: XB24_SU.10 126.712,145.168 127.66,144.22 136.91,144.22 137.71,143.42 137.71,139.04 143.28,133.47 v2(143.28,130.96)
GLED_EN_SU: JTAG.1 MEGA32U4.39 R26.2 | length 54.6
  Component Side Top w0.254: MEGA32U4.39 v1(154.92,134.37)
  Component Side Bottom w0.254: v1(153.82,107.16) 152.25,108.73 152.25,133.61 153.01,134.37 v1(154.92,134.37) 157.8,134.37 162.46,129.71 R26.2
GND: *.2 C1.1 C2.1 C3.1 C4.1 C5.1 C6.1 C7.2 C8.1 C9.2 C10.2 C11.2 C12.2 C13.2 C14.1 C15.2 C16.1 C17.1 C18.2 C19.2 C20.2 C21.1 DS3232.5 DS3232.6 DS3232.7 DS3232.8 DS3232.9 DS3232.10 DS3232.11 DS3232.12 DS3232.13 DUAL_NCH_1.1 DUAL_NCH_1.3 DUAL_NCH_2.1 DUAL_NCH_2.3 FRAM.4 INV.3 JST_BAT1.1 JTAG.2 JTAG.10 K30_*.7 MAIN_PWR_EN_OVRD.2 MCP73831.2 MCU_PWR.2 MEGA32U4.5 MEGA32U4.15 MEGA32U4.23 MEGA32U4.35 MEGA32U4.43 R6.1 R7.1 R8.1 R11.1 R12.1 R15.1 R17.2 R25.1 R27.1 RESET_SU.2 RTC_RESET.1 TPS62742.3 TPS63002.3 TPS63002.7 TPS63002.9 uUSB_1.5 WAKE.1 XB24_SU.1 XB24_SU.11 XB24_SU.13 XB24_SU.22 XB24_SU.35 | length 102.9
  Component Side Top w0.254: RESET_SU.2@106.49,126.29 106.692,126.088 v1(106.692,123.172) ; WAKE.1@110.29,145.08 110.29,143.78 v1(110.89,143.18) ; C2.1 v1(117.24,161.18) ; v1(118.21,161.18) C1.1 ; v1(120.34,152.1) 120.35,152.09 C5.1 ; RTC_RESET.1@122.22,103.57 v1@122.22,106.62 ; INV.3 127.28,155.95 v1(127.3,155.97) ; uUSB_1.5@126.352,168.204 v1(126.352,168.222) ; v1(127.63,164.78) 128.428,164.78 uUSB_1.5@129.002,165.354 ; v3(127.83,138.67) C4.1 ; C16.1 v1(129.32,105.44) ; uUSB_1.5@129.152,168.204 v1(129.152,168.222) ; v3(129.95,135.17) *.2 ; v1(131.452,168.178) uUSB_1.5@131.452,168.204 ; v1(133.6,110.88) C6.1 ; C3.1 v1(138.01,165.06) ; FRAM.4 v1(141.12,119) ; v1(147.31,112.21) JTAG.10 ; v1(147.4,107.13) JTAG.2 ; v1(152.01,164.86) 154.13,166.98 MCU_PWR.2 ; 155.06,153.61 v1(155.06,154.1)
  Component Side Top w0.5: MEGA32U4.15 137.07,135.97 v2(137.83,135.21) ; MEGA32U4.23 v2(137.68,129.96) ; v2(142.01,138.45) 142.48,138.92 MEGA32U4.5 ; v2(145.67,131.16) 145.68,131.17 MEGA32U4.35 ; v2(146.01,137.57) MEGA32U4.43
  Component Side Top w1: C9.2 155.06,153.61 C10.2@155.72,153.61
  Component Side Bottom w0.254: v1(106.692,123.172) XB24_SU.35 ; XB24_SU.1 XB24_SU.1@108.712,148.092 ; DS3232.8 DS3232.7 DS3232.6 DS3232.5 v1(122.21,106.63) ; v1(120.34,152.1) v1@120.39,152.15 ; DS3232.11 v1(120.94,118.06) ; C17.1@122.11,119.23 C17.1 ; R11.1 v1(125.31,158.47) ; v1(127.3,155.97) 129.36,155.97 R12.1@129.74,156.35 ; XB24_SU.11 v1(128.712,148.022) ; DUAL_NCH_1.1 129.51,154.15 129.14,153.78 129.14,152.21 129.74,151.61 DUAL_NCH_1.3 134.21,151.61 R15.1 134.7,152.1 v1(134.7,153.4) ; v1(132.692,122.998) XB24_SU.22 ; XB24_SU.13 v1(132.712,147.962) ; v1(139.39,143.44) C21.1 ; C8.1 142.8,156.88 v1(143.38,156.88) ; v1(145.98,158.76) R8.1 ; R6.1 148.49,145.43 v1(148.49,147.01) R7.1@150.2,145.3 ; v1@148.48,147.02 R17.2 ; v1(152.019,163.539) JST_BAT1.1 ; v1(156.37,122.1) 157.11,121.36 R25.1 ; DUAL_NCH_2.1 v1(157.5,116.5) 157.5,115.18 157.98,114.7 160.91,114.7 161.29,115.08 DUAL_NCH_2.3 ; R27.1 v1(165.98,121.37)
  Component Side Bottom w0.5: DS3232.9 DS3232.10 DS3232.11 DS3232.12 DS3232.13 ; v1(120.94,118.06) C17.1@122.11,119.23
  Component Side Bottom w0.6: C8.1@142.78,156.94 MCP73831.2
  Component Side Bottom w1: XB24_SU.1@108.712,148.092 108.712,149.182 109.19,149.66 v1(109.19,150.45) C19.2 v1(109.19,152.53)
  other v1: 115.37,157.78 120.02,157.82 134.252,168.204
  other v4: 150.04,153.26 151.64,153.26 150.84,153.76 150.04,154.26 151.64,154.26
  other v5: 117.122,157.812 118.122,157.812
MAIN_PWR_EN: INV.4 TPS62742.12 | length 4.3
  Component Side Top w0.254: TPS62742.12 119.384,156.1 v1(120.1,156.1)
  Component Side Bottom w0.254: v1(120.1,156.1) 122.74,156.1 122.63,155.99 v1(122.63,155.95)
MCU_PWR_EN: DUAL_NCH_1.4 MEGA32U4.1 R15.2 | length 28.1
  Component Side Top w0.254: v6(143.7,135.91) 144.44,136.65 144.44,137.75 145.68,138.99 MEGA32U4.1
  Component Side Bottom w0.254: DUAL_NCH_1.4 134.64,150.34 R15.2 134.69,148.44 138.49,144.64 138.49,140.29 142.87,135.91 v6(143.7,135.91)
Net*_1: *.1 MEGA32U4.17 | length 4
  Component Side Top w0.254: *.1 132.51,133.97 132.91,134.37 MEGA32U4.17
Net*_3: *.3 MEGA32U4.16 | length 4.3
  Component Side Top w0.254: *.3@131.38,136.39 132.36,136.39 133.58,135.17 MEGA32U4.16
NetC15_1: C15.1 R18.2 TPS63002.8 | length 7.6
  Component Side Top w0.254: R18.2 146.71,150.39 150.17,150.39 150.84,151.06 TPS63002.8 ; C15.1 148.49,150.37
NetCO2_IO_EN_2: CO2_IO_EN.2 K30_*.4 | length 9.6
  Component Side Top w0.254: K30_*.4 161.28,136.34 CO2_IO_EN.2
NetCO2_IO_EN_4: CO2_IO_EN.4 K30_*.5 | length 10.2
  Component Side Top w0.254: K30_*.5 158.03,142.13 158.03,141.12 160.27,138.88 CO2_IO_EN.4
NetCO2_IO_EN_6: CO2_IO_EN.6 K30_*.2 | length 4.6
  Component Side Top w0.254: K30_*.2 163.79,141.77 CO2_IO_EN.6
NetCO2_IO_EN_8: CO2_IO_EN.8 K30_*.3 | length 4.1
  Component Side Top w0.254: K30_*.3 CO2_IO_EN.8@163.79,144.31
NetD3_2: D3.2 R4.1 | length 3.4
  Component Side Top w0.254: v1(138.18,161.48) D3.2@138.18,163.1
  Component Side Bottom w0.254: R4.1 137.55,160.85 v1(138.18,161.48)
NetDS3232_4: DS3232.4 RTC_RESET.2 | length 6.6
  Component Side Top w0.254: RTC_RESET.2@122.22,101.97 122.91,101.97 123.48,102.54 v1(123.48,105.78)
  Component Side Bottom w0.254: v1(123.48,105.78) DS3232.4
NetDUAL_NCH_1_2: DUAL_NCH_1.2 R12.2 USB_PWR_ON.2 | length 19.8
  Component Side Top w0.254: USB_PWR_ON.2 126.65,160.31 v1(126.65,157.23)
  Component Side Bottom w0.254: v1(126.65,157.23) 127.24,157.82 131.1,157.82 131.53,157.39 R12.2 132.83,155.1 132.83,153.49 132.22,152.88 DUAL_NCH_1.2
NetDUAL_NCH_2_2: DUAL_NCH_2.2 R24.1 R25.2 | length 5.2
  Component Side Bottom w0.254: R25.2@157.89,119.58 R24.1 DUAL_NCH_2.2@160.19,116.67
NetDUAL_NCH_2_4: DUAL_NCH_2.4 R26.1 R27.2 | length 5.2
  Component Side Bottom w0.254: R26.1 R27.2 ; DUAL_NCH_2.4 R26.1@162.56,119.47
NetDUAL_NCH_2_5: DUAL_NCH_2.5 DUAL_NCH_2.6 DUAL_RG_LED1.2 | length 9.1
  Component Side Top w0.254: v1(162.56,112.16) 162.56,114.87 164.03,116.34 DUAL_RG_LED1.2
  Component Side Bottom w0.254: DUAL_NCH_2.6 DUAL_NCH_2.5 v1(162.56,112.16)
NetDUAL_NCH_2_7: DUAL_NCH_2.7 DUAL_NCH_2.8 DUAL_RG_LED1.4 | length 11.6
  Component Side Top w0.254: v1(166.36,117.39) v1@166.37,117.38
  Component Side Bottom w0.254: DUAL_NCH_2.8 DUAL_NCH_2.7 160.02,111.7 165.71,117.39 v1(166.36,117.39)
NetDUAL_RG_LED1_1: DUAL_RG_LED1.1 R20.1 | length 3.9
  Component Side Top w0.254: R20.1 164.97,110.37 DUAL_RG_LED1.1
NetDUAL_RG_LED1_3: DUAL_RG_LED1.3 R22.1 | length 7.1
  Component Side Top w0.254: R22.1 164.86,107.23 166.37,108.74 DUAL_RG_LED1.3
NetFRAM_1: FRAM.1 R13.1 | length 2.8
  Component Side Top w0.254: R13.1 140.02,113.84 FRAM.1
NetL1_1: L1.1 TPS62742.2
NetL2_1: L2.1 TPS63002.4
NetL2_2: L2.2 TPS63002.2
NetMCP73831_1: MCP73831.1 R4.2 | length 5.5
  Component Side Bottom w0.254: R4.2@139.37,159.99 143.27,159.99 143.73,159.53 MCP73831.1
NetMCP73831_5: MCP73831.5 R8.2 | length 2.3
  Component Side Bottom w0.254: MCP73831.5 R8.2
NetMCU_PWR_1: MCU_PWR.1 R10.2 | length 2.5
  Component Side Top w0.254: MCU_PWR.1 160.56,166.65 R10.2
NetMEGA32U4_33: MEGA32U4.33 R19.2 | length 3
  Component Side Top w0.5: MEGA32U4.33 146.76,126.79 R19.2
NetPWR_GOOD_MCU_RESET_1: PWR_G_RESET.1 R9.1 TPS62742.7 | length 7.2
  Component Side Top w0.254: PWR_G_RESET.1@109.7,156.1 111.03,156.1 111.45,155.68 R9.1 114.44,155.68 115.44,155.68 TPS62742.7
NetR1_1: R1.1 R5.2 RESET_SU.1 | length 20.5
  Component Side Top w0.254: RESET_SU.1@110.59,127.89 114.39,127.89 123.84,137.34 R1.1 123.86,137.59 R5.2
NetR16_1: R16.1 WAKE.2 | length 8.2
  Component Side Top w0.254: WAKE.2@110.29,146.68 114.19,150.58 v1(115.53,150.58)
  Component Side Bottom w0.254: v1(115.53,150.58) 115.57,150.62 R16.1
R\E\S\E\T\_SU: C4.2 JTAG.6 MEGA32U4.13 PWR_G_RESET.2 R5.1 | length 105.3
  Component Side Top w0.254: PWR_G_RESET.2 109.2,154.88 109.87,154.21 115.67,154.21 125.67,144.21 125.67,140.71 C4.2 128.64,140.71 130.69,138.66 132.415,138.66 133.505,137.57 MEGA32U4.13 ; v1(116.3,127.82) 116.3,114.65 121.27,109.68 148.668,109.68 JTAG.6 ; v1(116.3,132.11) 116.3,136.39 122.25,142.34 124.45,142.34 125.66,141.13 R5.1
  Component Side Bottom w0.254: v1(116.3,127.82) v1(116.3,132.11)
RADIO_EN_SU: MEGA32U4.25 R11.2 TPS62742.4 | length 66
  Component Side Top w0.254: v1(115.16,152.64) 120.3,147.5 120.3,142.26 v1(116.04,138) ; TPS62742.4 v8(117.372,160.008) ; v1(124.88,129.16) 129.05,129.16 130.06,130.17 132.56,130.17 133.68,129.05 133.68,127.29 135.75,125.22 136.7,125.22 137.66,126.18 137.66,126.2 138.86,126.2 139.28,126.62 MEGA32U4.25
  Component Side Bottom w0.254: v1(115.16,152.64) 115.16,153.74 118.85,157.43 ; v1(116.04,138) v1(124.88,129.16) ; v8(117.372,160.008) 118.9,158.48 118.9,157.43 119.42,156.91 121.22,156.91 R11.2
RADIO_R\E\S\E\T\_SU: MEGA32U4.32 R30.2 XB24_SU.6 | length 47.7
  Component Side Top w0.254: R30.2 117.57,141.85 118.75,143.03 v3(118.76,143.02) ; v1(130.43,129.18) 130.43,127.79 136.43,121.79 142.93,121.79 144.88,123.74 MEGA32U4.32
  Component Side Bottom w0.254: v3@118.712,143.02 XB24_SU.6 ; v3@118.725,142.985 130.43,131.28 v1(130.43,129.18)
RLED_EN_SU: JTAG.5 MEGA32U4.38 R24.2 | length 47.8
  Component Side Top w0.254: MEGA32U4.38 153.54,133.57 v1(153.56,133.55)
  Component Side Bottom w0.254: v1(154.06,109.7) 153.16,110.6 153.16,133.15 v1(153.56,133.55) 157.41,133.55 161.25,129.71 161.25,124.2 160.19,123.14 R24.2
RTS_SU: MEGA32U4.26 XB24_SU.29 | length 27
  Component Side Top w0.254: v1(138.18,125.08) 138.88,125.08 140.08,126.28 MEGA32U4.26
  Component Side Bottom w0.254: XB24_SU.29 118.692,126.582 119.57,127.46 132.91,127.46 135.29,125.08 v1(138.18,125.08)
RX_STRENGTH_SU: MEGA32U4.31 XB24_SU.7 | length 42.2
  Component Side Top w0.254: v1(131.86,129.18) 131.86,127.89 137.2,122.55 142.36,122.55 144.08,124.27 MEGA32U4.31
  Component Side Bottom w0.254: XB24_SU.7 120.712,142.568 131.86,131.42 v1(131.86,129.18)
RXD_CO2: CO2_IO_EN.1 JTAG.3 MEGA32U4.37 | length 49.6
  Component Side Top w0.254: MEGA32U4.37 163.19,132.77 v1(163.21,132.79) 163.21,129.3 160.14,126.23 v1(160.14,126.4)
  Component Side Bottom w0.254: v1(154.12,108.4) 154.59,108.4 155.29,109.1 155.29,122.65 159.04,126.4 v1(160.14,126.4) ; v1(163.21,132.79) 163.13,132.79 CO2_IO_EN.1
RXD_SU: MEGA32U4.20 XB24_SU.3 | length 31.9
  Component Side Top w0.254: v1(126.394,130.094) 128.31,132.01 135.14,132.01 MEGA32U4.20
  Component Side Bottom w0.254: XB24_SU.3 112.712,143.828 126.394,130.146 v1(126.394,130.094)
SCL_SENS_BRD: CO2_IO_EN.7 DS3232.16 FRAM.6 MEGA32U4.18 R28.2 | length 96.4
  Component Side Top w0.254: MEGA32U4.18 132.95,133.57 132.59,133.21 125.65,133.21 122.43,129.99 122.43,116.76 123.54,115.65 126.25,115.65 127.3,116.7 v1(127.3,117.72) 133.28,117.72 133.46,117.9 135.75,117.9 137.93,120.08 157.59,120.08 168.71,131.2 168.71,141.93 CO2_IO_EN.7 ; R28.2@146.88,118.5 146.88,120.07
SDA_SENS_BRD: CO2_IO_EN.5 DS3232.15 FRAM.5 MEGA32U4.19 R29.2 | length 84.2
  Component Side Top w0.254: MEGA32U4.19 133.08,132.77 132.91,132.6 126.45,132.6 123.49,129.64 123.49,123.06 125.99,120.56 v1(125.99,117.72) 127.23,118.96 133.25,118.96 133.46,119.17 135.33,119.17 137.04,120.88 156.71,120.88 165.42,129.59 165.42,140.16 CO2_IO_EN.5 ; 146.82,120.97 R29.2@146.82,122.56
SLEEP_STATUS_SU: MEGA32U4.27 XB24_SU.26 | length 23.3
  Component Side Top w0.254: v1(140.9,124.65) MEGA32U4.27@140.9,127.85
  Component Side Bottom w0.254: XB24_SU.26 124.692,122.568 126.14,121.12 137.37,121.12 v1(140.9,124.65)
TDI: CO2_IO_EN.3 JTAG.9 MEGA32U4.36 | length 49.5
  Component Side Top w0.254: MEGA32U4.36 v1@161.99,131.97 ; JTAG.9 v1@154.22,113.688 ; v1(154.22,121.84) 161.99,129.61 v1(161.99,131.93)
  Component Side Bottom w0.254: v1(154.22,113.92) v1(154.22,121.84) ; v1(161.99,131.93) 165.48,131.93 168.37,134.82 168.37,137.19 CO2_IO_EN.3
TXD_SU: MEGA32U4.21 XB24_SU.4 | length 29
  Component Side Top w0.254: v1(129.03,130.72) 132.42,130.72 132.87,131.17 MEGA32U4.21
  Component Side Bottom w0.254: XB24_SU.4 114.712,143.698 127.65,130.76 127.66,130.77 127.71,130.72 v1(129.03,130.72)
VBAT_LEVEL_SU: MEGA32U4.40 R3.1 R7.2 | length 15.4
  Component Side Top w0.254: MEGA32U4.40 151.97,135.17 152.75,135.95 v1(152.75,137.46)
  Component Side Bottom w0.254: R3.1 R7.2 152.86,140.63 152.75,140.52 v1(152.75,137.46)
VBAT_RAW: JST_BAT1.2 SW_.1 | length 14.6
  Component Side Top w0.254: v1(145.506,165.094) SW_.1
  Component Side Bottom w1: v1(145.506,165.094) 149.63,160.97 153.44,160.97 154.019,161.549 JST_BAT1.2
VBAT_SU: C8.2 C17.2 D2.1 DS3232.14 MCP73831.3 SW_.2 | length 106
  Component Side Top w0.254: v1(140.43,156.89) v1@140.58,156.89
  Component Side Top w1: v1@140.58,156.89 142.506,158.816 SW_.2
  Component Side Bottom w0.254: C17.2 124.75,118.56 DS3232.14 ; D2.1 D2.1@138.68,156.92
  Component Side Bottom w0.5: C17.2 124.99,120.14 149.57,120.14 150.89,121.46 150.89,133.87 153.39,136.37 157.42,136.37 161.69,140.64 161.69,153.12 159.03,155.78 141.54,155.78 v1(140.43,156.89)
  Component Side Bottom w0.75: 141.36,158.08 MCP73831.3
  Component Side Bottom w1: D2.1@138.68,156.92 C8.2 141.36,158.08
VBUS_DETECT: MEGA32U4.41 R2.1 R6.2 | length 13.6
  Component Side Top w0.254: MEGA32U4.41 150.71,135.97 v1(151.44,136.7)
  Component Side Bottom w0.254: R2.1@146.05,143.3 R6.2 148.16,142.22 151.44,138.94 v1(151.44,136.7)
VBUS_SU: C3.2 D1.1 D3.1 MCP73831.4 MEGA32U4.7 R2.2 USB_PWR_ON.1 uUSB_1.1 | length 56.5
  Component Side Top w0.254: USB_PWR_ON.1 126.66,166.3 127,166.64 131.36,166.64 131.602,166.398 uUSB_1.1 ; D1.1@136.58,160.31 D1.1 136.21,160.44 134.7,158.93 134.7,155.1 137.12,152.68 138.27,152.68 v1(139.65,151.3) 144.87,146.08 v1(145.98,146.08) ; v1(139.65,146.35) 139.65,145.27 140.88,144.04 MEGA32U4.7
  Component Side Top w0.5: D1.1@136.58,160.31 139.61,160.31 v1(140.7,161.4)
  Component Side Top w1: 131.88,165.354 135.096,165.354 136.21,164.24 D1.1
  Component Side Bottom w0.254: v1@139.64,151.3 139.65,151.29 v1(139.65,146.35) ; v1(145.98,146.08) v1@146.04,146.02
  Component Side Bottom w0.5: v1(140.7,161.4) MCP73831.4@141.78,161.4
VIN: C1.2 C5.2 C14.2 D1.2 D2.2 INV.5 R3.2 R14.1 R18.1 TPS62742.1 TPS62742.8 TPS62742.9 TPS62742.10 TPS62742.11 TPS63002.5 | length 72.8
  Component Side Top w0.254: TPS62742.8 TPS62742.9 TPS62742.10 TPS62742.11 118.372,155.438 118.7,155.11 120.38,155.11 121.29,156.02 ; v1@119.92,159.52 121.29,158.15 121.29,156.02 ; INV.5@123.26,154.05 121.29,156.02 ; C5.2@123.36,152.41 C5.2 R14.1@125.49,152.09 ; v7(137.43,154.15) 139.57,154.15 147.71,146.01 v1(152.22,146.01) ; R18.1@146.01,153.13 146.01,155.5
  Component Side Top w0.5: C5.2@123.36,152.41 INV.5
  Component Side Top w1: D1.2 137.39,155.5 ; v7@137.39,154.19 137.39,155.5 ; C14.2 146.01,155.5 137.39,155.5
  Component Side Bottom w0.254: v1(152.22,146.01) v1@152.26,145.97
  Component Side Bottom w1: v1(119.99,160.36) 134.67,160.36 134.67,156.92 v7@137.435,154.155
  other v1: 119.99,159.47
WAKE_ALARM_SU: C13.1 DS3232.3 DUAL_NCH_1.5 DUAL_NCH_1.6 DUAL_NCH_1.7 DUAL_NCH_1.8 INV.2 MAIN_PWR_EN_OVRD.1 R14.2 R16.2 | length 99.4
  Component Side Top w0.254: MAIN_PWR_EN_OVRD.1 114.88,167.38 119.47,167.38 121.82,165.03 124.52,165.03 128.42,161.13 128.42,155.56 127.31,154.45 ; v1(123.96,110.98) 119.61,115.33 119.61,130.16 124.27,134.82 126.6,134.82 v3(128.39,136.61) ; INV.2 126.76,155 127.31,154.45 ; v3(130.96,142.59) 130.96,148.46 R14.2 127.31,154.45
  Component Side Bottom w0.254: R16.2 121.9,150.62 122.54,151.26 C13.1 124.42,152.15 ; v1(123.96,110.98) 124.75,110.19 DS3232.3 ; DUAL_NCH_1.5 DUAL_NCH_1.6 DUAL_NCH_1.7 DUAL_NCH_1.8 126.97,154.15 127.86,153.26 v1(127.86,152.12) ; v3(128.39,136.61) 130.96,139.18 v3(130.96,142.59)
pads on no net: DS3232.1 FRAM.2 FRAM.3 FRAM.7 INV.1 JST_BAT1.3 JTAG.7 JTAG.8 K30_*.8 K30_*.9 MEGA32U4.2 MEGA32U4.8 MEGA32U4.9 MEGA32U4.10 MEGA32U4.11 MEGA32U4.29 MEGA32U4.42 SW_.3 SW_.4 SW_.5 uUSB_1.4 XB24_SU.5 XB24_SU.8 XB24_SU.9 XB24_SU.12 XB24_SU.14 XB24_SU.15 XB24_SU.16 XB24_SU.17 XB24_SU.18 XB24_SU.19 XB24_SU.20 XB24_SU.21 XB24_SU.23 XB24_SU.24 XB24_SU.27 XB24_SU.28 XB24_SU.30 XB24_SU.31 XB24_SU.32 XB24_SU.33 XB24_SU.34 XB24_SU.36 XB24_SU.37
copper on no net: | length 0.1
  Component Side Top w0.254: v1(139.586,168.76) v1@139.606,168.74 ; v1(146.88,168.74) v1@146.906,168.74

## Polygon pours and split planes (outlines as drawn)
NetL1_1 on Component Side Top "3v3Reg_L" (solid, remove dead copper, pour order 6): 118.25,159.2 118.25,159.64 118.69,160.31 118.86,160.59 118.86,161.83 118.6,162.09 118.503,162.187 118.503,165.196 119.512,165.196 119.553,165.155 119.553,162.505 119.19,161.668 119.19,160.231 118.63,159.54 118.503,159.387 118.47,159.2
+3V3 on Component Side Top "3v3RegOut" (solid, remove dead copper, pour order 4): 116.99,159.18 116.75,159.18 116.75,159.42 116.55,159.69 115.32,160.73 115.32,161.63 115.34,161.65 115.34,164.642 115.528,164.83 116.378,165.68 116.903,165.68 116.903,161.98 116.41,161.82 116.41,161.487 116.41,161.4 116.41,160.58 116.94,159.92 116.99,159.46
GND on Component Side Top "3v3RegGND" (solid, remove dead copper, pour order 2): 115.01,158.26 117.71,158.26 117.73,158.28 117.74,158.29 117.74,159.58 117.74,159.85 117.63,160.4 116.73,160.86 116.73,161.73 118.75,161.73 118.75,160.77 118.01,159.42 118.02,158.49 118.01,158.48 118.228,158.262 118.622,158.262 120.37,158.26 120.56,158.07 120.56,157.56 120.34,157.34 119.82,157.34 115.01,157.34 114.79,157.56 114.79,158.04
GND on Component Side Top "RegGND" (solid, remove dead copper, pour order 0): 150.2,152.344 150.2,152.999 148.01,152.999 147.29,153.719 147.29,154.5 150.509,154.5 150.702,154.693 150.702,155.787 150.967,155.787 150.977,155.777 150.98,154.703 150.98,154.67 151.235,154.415 152.047,154.415 152.036,152.938 151.654,152.938 151.478,152.441 151.365,152.441 151.203,152.441 151.203,152.61 150.943,152.885 150.64,152.885 150.575,152.82 150.478,152.723 150.478,152.344
VIN on Component Side Top "3v3Reg_In" (solid, remove dead copper, pour order 8): 119.36,161.59 119.36,160.75 119.36,160.07 118.76,159.47 118.76,159.28 118.76,158.75 118.97,158.54 119.61,158.54 119.89,158.54 120.49,159.14 120.49,161.19 120.09,161.59
+3V3_RADIO_SU on Component Side Top "+3V3_RADIO_SU_L01_P012" (solid, remove dead copper, pour order 12): 116.48,158.56 116.48,159.48 115.98,159.98 113.76,159.98 113.36,159.58 113.36,158.92 113.72,158.56
VIN on Component Side Top "5vReg_vin" (solid, remove dead copper, pour order 14): 147.68,155.97 147.89,156.18 149.85,156.18 149.85,154.85 149.86,154.84 149.68,155.02 147.68,155.02
NetL2_1 on Component Side Top "L1_pin" (solid, remove dead copper, pour order 16): 150.2,154.96 150.2,156.193 149.522,156.871 149.08,157.313 149.08,160.129 149.581,160.63 150.13,160.63 150.478,160.282 150.478,154.96
NetL2_2 on Component Side Top "L1_pin_2" (solid, remove dead copper, pour order 18): 151.198,155.181 151.198,160.085 151.742,160.63 152.265,160.63 152.78,160.115 152.78,157.443 152.164,156.826 151.535,156.302 151.477,156.139 151.477,155.278 151.477,155.137 151.435,155.095
CO2_PWR on Component Side Top "5vReg_vout" (solid, remove dead copper, pour order 20): 151.81,152.65 154.46,152.65 156.18,152.65 156.28,151.29 156.32,147.28 156.77,146.91 157.97,146.91 159.14,147.64 159.66,147.76 160.17,147.64 160.53,147.36 160.66,146.91 160.6,146.38 160.21,145.99 159.66,145.88 158.11,145.88 156.28,145.88 155.34,146.63 155.34,147.28 155.34,150.79 154.25,151.34 151.84,151.34
GND on Component Side Top "CO2_GND" (solid, remove dead copper, pour order 22): 156.86,151.4 156.86,147.31 156.94,147.23 157.77,147.23 159.15,147.99 159.4,148.13 159.93,148.26 160.27,148.46 160.47,148.8 160.59,149.32 160.55,149.88 160.3,150.25 159.76,150.57 157.67,151.4
+3V3_RADIO_SU on Component Side Bottom "3v3Reg_Radio" (solid, remove dead copper, pour order 10): 115.76,158.9 115.76,159.61 115.39,159.98 113.76,159.98 113.36,159.58 113.36,158.92 113.72,158.56 115.42,158.56
GND on Ground Plane (split plane): 169.49,100.51 108.81,100.51 108.81,117.35 104.11,117.35 100.58,120.88 100.58,128.76 101.38,129.56 105.97,129.56 105.97,129.54 108.81,129.54 108.81,137.11 108.79,143.28 105.55,143.28 105.55,154.54 108.78,154.54 108.78,169.49 169.49,169.49
+3V3 on Power Plane (split plane): 169.49,100.51 108.8,100.51 108.8,117.36 104.1,117.36 100.57,120.89 100.57,128.77 101.37,129.57 105.96,129.57 105.96,129.55 108.8,129.55 108.8,137.12 108.78,143.29 105.54,143.29 105.54,154.55 108.77,154.55 108.77,169.49 169.49,169.49

## Other copper
Ground Plane (plane layer: these items are gaps in the copper):
  pour cut-out: 108.78,171.36 108.78,154.54 105.55,154.54 105.55,143.28 108.79,143.28 108.81,137.11 108.81,129.54 105.97,129.54 105.97,129.56 101.38,129.56 100.58,128.76 100.58,120.88 104.11,117.35 108.81,117.35 108.81,98.8 108.72,98.71 98.81,98.71 98.81,171.36
Power Plane (plane layer: these items are gaps in the copper):
  pour cut-out: 108.77,171.37 108.77,154.55 105.54,154.55 105.54,143.29 108.78,143.29 108.8,137.12 108.8,129.55 105.96,129.55 105.96,129.57 101.37,129.57 100.57,128.77 100.57,120.89 104.1,117.36 108.8,117.36 108.8,98.81 108.71,98.72 98.8,98.72 98.8,171.37

## Silkscreen, mask and mechanical layers (free items; w line width, h text height)
Top Overlay:
  text "10" at 145.02,111.98 h0.9
  text "BACON V2 CO2 Sensor Unit." at 102,110 h1 r90
  text "Victoria University & BRANZ 2017" at 104,110 h1 r90
  text "1" at 155.038,106.357 h0.9

## Text inside footprints (layer, text, board x,y; h text height)
CO2_IO_EN: Top Overlay "2" at 164.648,133.8 h1.27 r90; Top Overlay "1" at 167.188,134.308 h1.27 r90; Top Overlay "7" at 167.188,145.484 h1.27 r90; Top Overlay "8" at 164.648,145.484 h1.27 r90
JTAG: Mechanical 1 "J1" at 151.154,109.235 h0.64 r90
RESET_SU: Top Overlay "SW" at 107.715,126.74 h1
RTC_RESET: Top Overlay "SW" at 123.445,102.42 h1
WAKE: Top Overlay "SW" at 109.065,146.23 h1 r180